# Altium PCB PCB1.PcbDoc
Units mm, origin at the board's own origin, x right, y up, seen from the top; angles counter-clockwise.
Board outline 69.47 x 25.4 mm, 2 copper layers (Top Layer, Bottom Layer); 44 components, 24 nets, 117 pads, 21 vias.
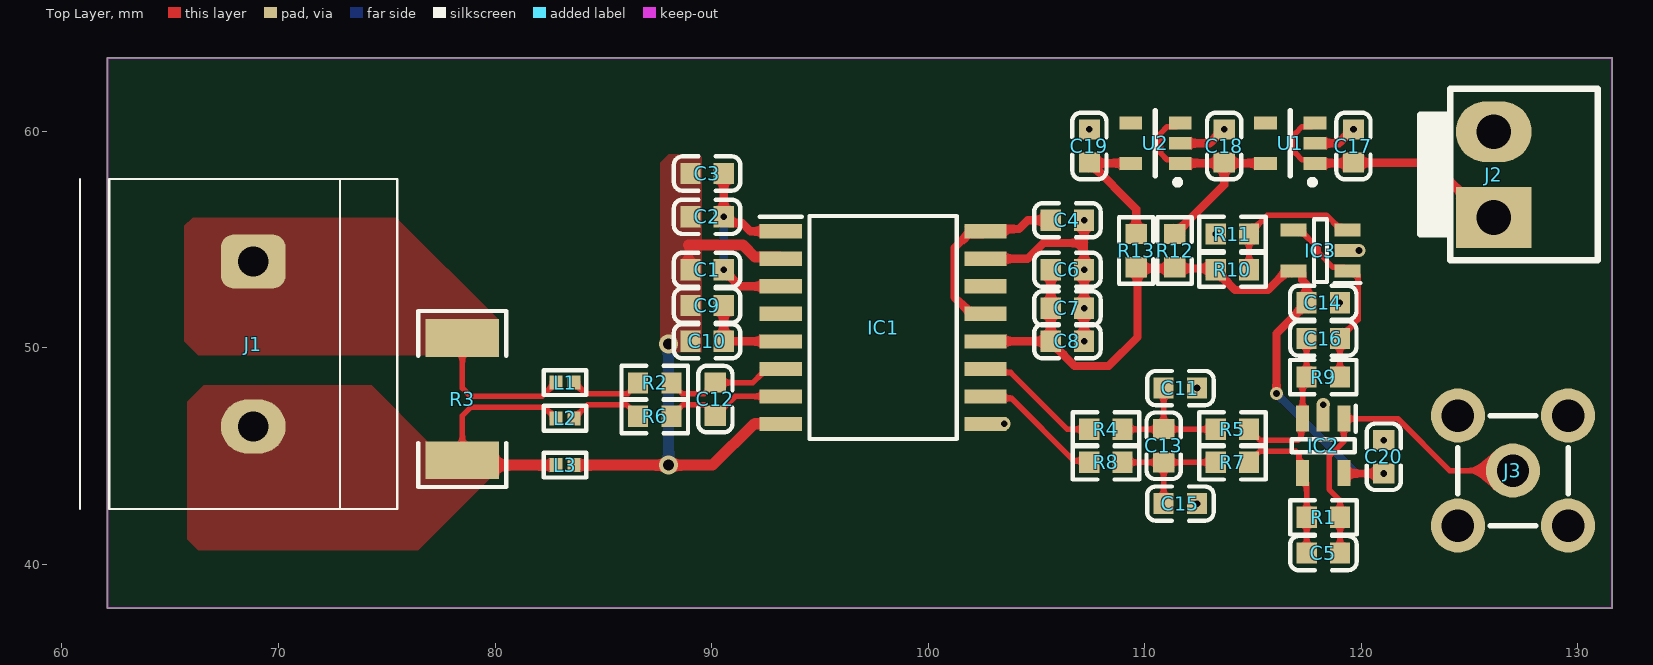
[diagram p0: Top Layer view]
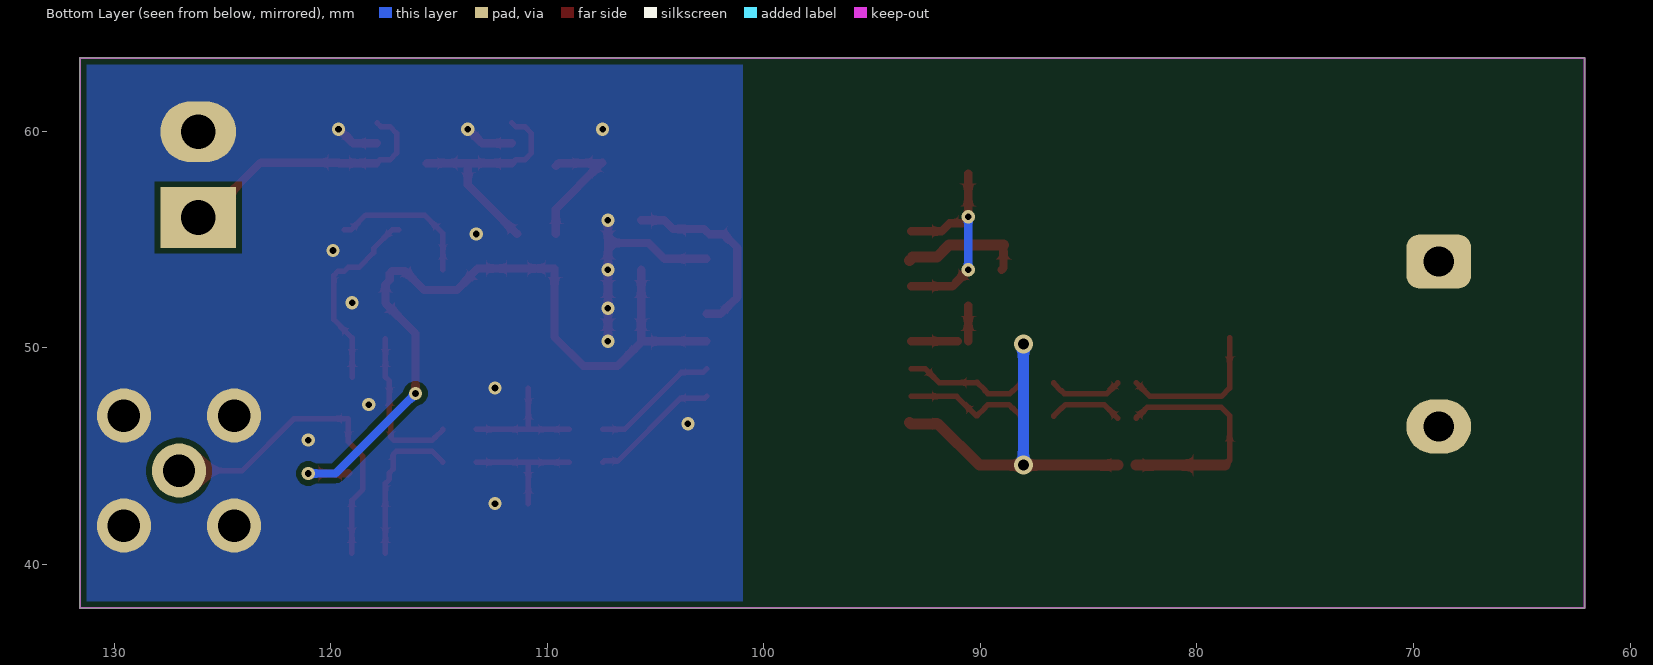
[diagram p1: Bottom Layer view, seen from below]
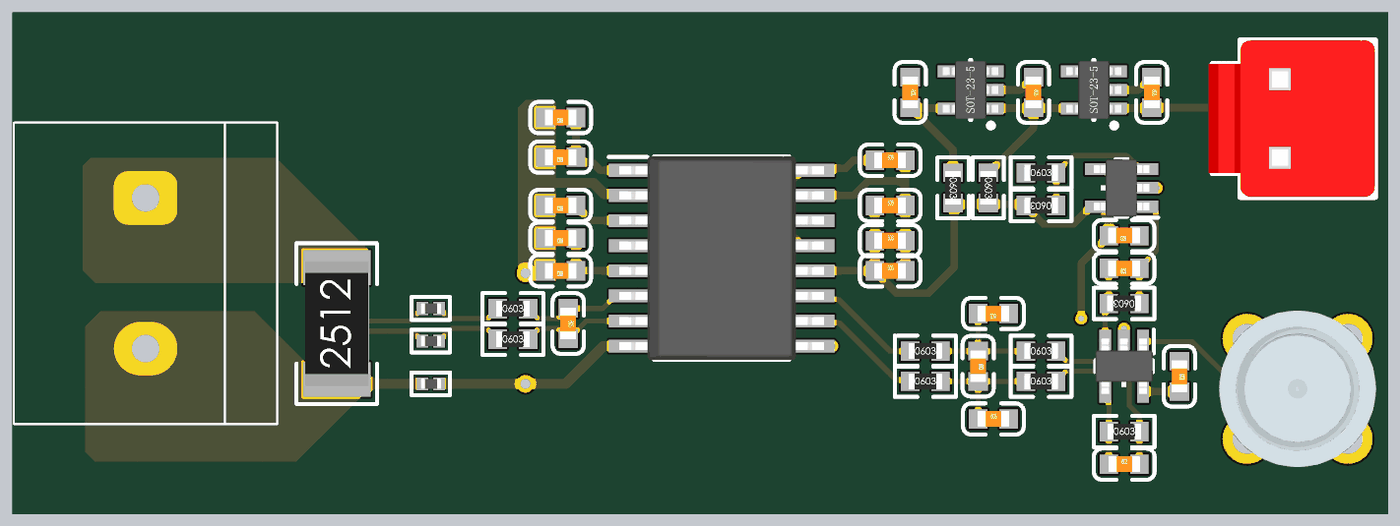
[diagram p2: 3D render of the assembled board from above, using the file's embedded part models]

## Layer stack, top to bottom
Top Solder: solder mask 0.0102, Solder Resist, Dk 3.5
Top Layer: signal copper 0.0356
Dielectric 1: dielectric 0.32, FR-4, Dk 4.8
Bottom Layer: signal copper 0.0356
Bottom Solder: solder mask 0.0102, Solder Resist, Dk 3.5

## Board outline
62.103,37.973 131.572,37.973 131.572,63.373 62.103,63.373

## Design rules (kind name [scope] priority, off if disabled: settings)
Clearance Clearance_1 [All] p1: gap=0.254 ignorepadtopadclearanceinfootprint=FALSE except(0.178: SMDPad-SMDPad)
Clearance [All] p2: gap=0.254 ignorepadtopadclearanceinfootprint=FALSE
HoleToHoleClearance [All] p1: gap=0 allowstackedmicrovias=TRUE
MinimumSolderMaskSliver [All] p1: minsoldermaskwidth=0
PlaneConnect [All] p1: planeconnectstyle=Direct reliefexpansion=0.508 reliefentries=4 reliefconductorwidth=0.254 reliefairgap=0.254
PolygonConnect [All] p1: connectstyle=Direct reliefconductorwidth=0.254 reliefentries=4 polygonreliefangle="90 Angle" airgapwidth=0.254
RoutingVias [All] p1: holewidth=0.254 width=0.559 viastyle="Through Hole" minholewidth=0.254 minwidth=0.508 maxholewidth=0.711 maxwidth=1.27
SilkToSilkClearance [All] p1: silktosilkclearance=0
SilkToSolderMaskClearance [IsPad] p1: minsilkscreentomaskgap=0 clearancetoexposedcopper=TRUE
SolderMaskExpansion [All] p1: expansion=0.102 istentingtop=FALSE
SupplyNets "Schematic Supply Nets_5" [InNet('GND')] p1: voltage=0.000
SupplyNets "Schematic Supply Nets_4" [InNet('Vin')] p2: voltage=0.000
SupplyNets "Schematic Supply Nets_3" [InNet('VCC')] p3: voltage=0.000
SupplyNets "Schematic Supply Nets_2" [InNet('+5V')] p4: voltage=0.000
SupplyNets "Schematic Supply Nets_1" [InNet('+3V3')] p5: voltage=0.000
SupplyNets "Schematic Supply Nets" [InNet('HGND')] p6: voltage=0.000
Width [All] p1: maxlimit=0.762 minlimit=0.254 preferedwidth=0.254
25 further rules are at their usual default settings.

## Components (designator, comment, footprint, x,y, rotation, side; value= is the part's Value field where it differs from the comment)
C1 "1nF" C-0603 89.789,53.594 r180 top
C2 "0.1uF" C-0603 89.789,56.039 r180 top
C3 "1uF" C-0603 89.789,58.039 r180 top
C4 "0.1uF" C-0603 106.426,55.88 r0 top
C5 "330pF" C-0603 118.245,40.513 r0 top
C6 "1nF" C-0603 106.426,53.594 r0 top
C7 "1uF" C-0603 106.426,51.816 r0 top
C8 "10uF" C-0603 106.426,50.292 r0 top
C9 "0.1uF" C-0603 89.789,51.943 r180 top
C10 "1nF" C-0603 89.789,50.292 r180 top
C11 "NP" C-0603 111.641,48.133 r180 top
C12 "10nF" C-0603 90.17,47.625 r270 top
C13 "NP" C-0603 110.871,45.466 r270 top
C14 "0.1uF" C-0603 118.237,52.07 r180 top
C15 "NP" C-0603 111.641,42.799 r0 top
C16 "330pF" C-0603 118.237,50.419 r180 top
C17 "1uF" C-0603 119.634,59.309 r270 top
C18 "1uF" C-0603 113.665,59.309 r270 top
C19 "1uF" C-0603 107.442,59.309 r270 top
C20 "0.1uF" C-0603 121.031,44.958 r270 top
IC1 "AMC3302DWE" SOIC127P1030X265-16N 97.917,50.927 r0 top
IC2 "TLV9001IDBVR" SOT95P280X145-5N 118.237,45.466 r270 top
IC3 "TLV9001IDBVR" SOT95P280X145-5N 118.11,54.483 r180 top
J1 "J-2PIN" "CON  7.62mm 2x1P" 68.834,50.165 r270 top
J2 "J-2PIN" J-VH3.96-2A 126.111,56.007 r90 top
J3 "J-2PIN" "SMA RF同轴链接器" 127,44.323 r0 top
L1 "FB" L-0402 83.229,48.387 r0 top
L2 "FB" L-0402 83.229,46.736 r0 top
L3 "FB" L-0402 83.229,44.577 r0 top
R1 "3.3k" R-0603 118.245,42.164 r0 top
R2 "10R" R-0603 87.376,48.37 r0 top
R3 "R" R-2512 78.486,47.625 r90 top
R4 "0R" R-0603 108.204,46.228 r0 top
R5 "3.3k" R-0603 114.046,46.228 r0 top
R6 "10R" R-0603 87.376,46.83 r0 top
R7 "3.3k" R-0603 114.046,44.704 r0 top
R8 "0R" R-0603 108.204,44.704 r0 top
R9 "3.3k" R-0603 118.237,48.641 r180 top
R10 "3.3k" R-0603 114.046,53.594 r180 top
R11 "3.3k" R-0603 114.046,55.245 r0 top
R12 "0R" R-0603 111.379,54.483 r270 top
R13 "0R" R-0603 109.601,54.483 r270 top
U1 "TPS7A20-5V" SOT-235 116.713,59.436 r180 top
U2 "TPS7A20-3V3" SOT-235 110.49,59.436 r180 top

## Footprints (in the part's own frame and the unit in brackets; to place one, negate y for a bottom-side part, rotate by r counter-clockwise, add the part's x,y. Pads: shape width x height; smd on the part's side, far side on the other; paste and mask are expansions set on the pad)
C-0603 [mm]
  rect 0.93x0.98 smd: 1(-0.77,0) 2(0.77,0)
  silkscreen extent -1.53,-0.79 1.54,0.79, body extent -0.8,-0.4 0.8,0.4, height 0.3
"CON  7.62mm 2x1P" [mm]
  rrect50% 2.5x3 hole 1.4: 1(-3.81,0)
  oval 2.5x3 hole 1.4: 2(3.81,0)
  silkscreen extent -7.62,-8 7.62,6.65
J-VH3.96-2A [mm]
  rect 2.8x3.5 hole 1.6: 1(0,0)
  oval 2.8x3.5 hole 1.6: 2(3.96,0)
  silkscreen extent -1.98,-4.8 5.94,3.4, body extent -1.98,-4.8 5.94,3.6, height 14.6
L-0402 [mm]
  rect 0.6x0.65 smd mask+0.051: 1(-0.425,0) 2(0.425,0)
  silkscreen extent -0.97,-0.58 0.97,0.58, body extent -0.51,-0.26 0.54,0.26, height 0.36
R-0603 [mm]
  rect 0.93x0.98 smd: 1(-0.77,0) 2(0.77,0)
  silkscreen extent -1.53,-0.79 1.54,0.79, body extent -0.85,-0.4 0.85,0.4, height 0.56
R-2512 [mm]
  rect 1.75x3.4 smd: 1(-2.825,0) 2(2.825,0)
  silkscreen extent -4.06,-2.03 4.06,2.03, body extent -3.16,-1.6 3.16,1.6, height 0.62
"SMA RF同轴链接器" [mm]
  round 2.5 hole 1.5: 1(0,0) 2(-2.54,-2.54) 2(-2.54,2.54) 2(2.54,-2.54) 2(2.54,2.54)
  silkscreen extent -2.54,-2.54 2.54,2.54, body extent -3.96,-3.96 3.96,3.96, height 9.5
SOIC127P1030X265-16N [mm]
  rect 1.95x0.65 smd: 1(-4.725,4.445) 2(-4.725,3.175) 3(-4.725,1.905) 4(-4.725,0.635) 5(-4.725,-0.635) 6(-4.725,-1.905) 7(-4.725,-3.175) 8(-4.725,-4.445) 9(4.725,-4.445) 10(4.725,-3.175) 11(4.725,-1.905) 12(4.725,-0.635) 13(4.725,0.635) 14(4.725,1.905) 15(4.725,3.175) 16(4.725,4.445)
  silkscreen extent -5.7,-5.15 3.4,5.15, body extent -5.17,-5.15 5.17,5.15, height 2.59
SOT95P280X145-5N [mm]
  rect 1.2x0.6 smd: 1(-1.25,0.95) 2(-1.25,0) 3(-1.25,-0.95) 4(1.25,-0.95) 5(1.25,0.95)
  silkscreen extent -1.85,-1.45 0.3,1.5, body extent -1.4,-1.45 1.4,1.45, height 1.2
SOT-235 [mm] "SOT23, 5-Leads, Body 3.0x2.6mm (max), Pitch 0.95mm, IPC Medium Density"
  rect 1.05x0.6 smd: 1(-1.143,0.94) 2(-1.143,0) 3(-1.143,-0.94) 4(1.143,-0.94) 5(1.143,0.94)
  silkscreen extent -1.15,-1.5 0,1.92, body extent -1.4,-1.45 1.4,1.45, height 1.2

## Part data
C1 C2 C3 C4 C5 C6 C7 C8 C9 C10 C11 C12 C13 C14 C15 C16 C17 C18 C19 C20: library part C, "Non Polarised"
IC1: "Integrated Circuit", Manufacturer_Name="Texas Instruments", Mouser Part Number=595-AMC3302DWE, Arrow Part Number=AMC3302DWE, Arrow Price/Stock=https://www.arrow.com/en/products/amc3302dwe/texas-instruments?region=nac, Datasheet Link=https://www.ti.com/lit/ds/symlink/amc3302.pdf?ts=1643366130509, Height=2.65mm, Manufacturer_Part_Number=AMC3302DWE, Mouser Price/Stock=https://www.mouser.co.uk/ProductDetail/Texas-Instruments/AMC3302DWE?qs=DRkmTr78QAT3OfY8Rd%252BeWA%3D%3D
IC2 IC3: "Integrated Circuit", Manufacturer_Name="Texas Instruments", Mouser Part Number=595-TLV9001IDBVR, Arrow Part Number=TLV9001IDBVR, Arrow Price/Stock=https://www.arrow.com/en/products/tlv9001idbvr/texas-instruments?region=europe, Datasheet Link=http://www.ti.com/lit/gpn/tlv9001, Height=1.45mm, Manufacturer_Part_Number=TLV9001IDBVR, Mouser Price/Stock=https://www.mouser.co.uk/ProductDetail/Texas-Instruments/TLV9001IDBVR?qs=gTYE2QTfZfR6dUkET6Yj7w%3D%3D
L1 L2 L3: library part L-SMD, "1.8k@100Mhz"
R1 R2 R4 R5 R6 R7 R8 R9 R10 R11 R12 R13: library part R, "Resistor"
R3: "Resistor"
U1: library part TPS7A20-3V3, "LDO  最大输出300mA"
U2: "LDO  最大输出300mA"

## Via types
v1: diameter 0.61, hole 0.305, Top Layer to Bottom Layer, 19 vias
v2: diameter 0.889, hole 0.508, Top Layer to Bottom Layer, 2 vias

## Nets (pads, with @x,y where several pads share a name; then routed paths per layer and width w, separated by ;. In a path a pad name is that pad's centre, name@x,y a point inside that pad or via, vN(x,y) a via of type N, cw(c..) or ccw(c..) an arc to the next point about the centre after c; other vN are vias at no path point)
+3V3: C19.2 R13.1 U2.5 | length 6.4
  Top Layer w0.381: C19.2 107.467,58.539 C19.2@107.488,58.518 ; R13.1 109.601,56.405 C19.2@107.488,58.518 ; U2.5@109.601,58.387 109.47,58.518 C19.2@107.488,58.518
+5V: C18.2 R12.1 U1.5 U2.1 U2.3 | length 11.3
  Top Layer w0.254: U2.1 111.46,58.669 111.036,58.669 110.727,58.978 110.727,59.894 111.036,60.203 111.46,60.203 U2.3
  Top Layer w0.381: R12.1 111.404,55.253 113.665,57.514 C18.2@113.665,58.518 ; U2.1 111.654,58.518 C18.2@113.665,58.518 ; U1.5 115.549,58.518 C18.2@113.665,58.518
GND: C4.2 C6.2 C7.2 C8.2 C11.1 C14.1 C15.2 C17.1 C18.1 C19.1 C20.1 IC1.9 IC1.15 IC2.2 IC3.2 J2.2 J3.2 R11.1 U1.2 U2.2 | length 14.8
  Top Layer w0.381: IC1.15 104.58,54.102 105.312,54.833 107.196,54.833 ; v1(107.196,50.292) v1(107.196,51.816) v1(107.196,53.594) 107.196,54.833 ; v1(107.196,55.88) 107.196,54.833 ; U2.2 112.997,59.436 113.64,60.079 v1(113.665,60.079) ; U1.2 118.966,59.436 119.609,60.079 v1(119.634,60.079)
  other v1: 112.411,42.799 121.031,45.728 103.505,46.482 118.237,47.371 112.411,48.133 119.007,52.07 119.888,54.483 113.276,55.245 107.442,60.079
HGND: C1.2 C2.2 C3.2 C9.2 C10.2 IC1.2 IC1.8 L3.2 | length 21.8
  Top Layer w0.381: 88.931,54.737 88.931,53.682 C1.2
  Top Layer w0.508: L3.2 v2(88.011,44.577) 90.043,44.577 91.948,46.482 IC1.8 IC1.8@93.263,46.553 ; 88.931,54.737 91.44,54.737 92.004,54.173 93.121,54.173 IC1.2@93.263,54.031
  Bottom Layer w0.508: v2(88.011,44.577) v2(88.011,50.165)
NetC1_1: C1.1 C2.1 C3.1 IC1.1 IC1.3 | length 10.3
  Top Layer w0.381: v1(90.559,53.594) 90.559,53.569 91.296,52.832 IC1.3 ; C3.1 v1(90.559,56.039) 90.559,56.014 90.834,55.739 91.426,55.739 91.793,55.372 IC1.1
  Bottom Layer w0.381: v1(90.559,53.594) v1(90.559,56.039)
NetC4_1: C4.1 IC1.13 IC1.16 | length 9
  Top Layer w0.381: IC1.13 101.992,51.562 101.501,52.053 101.492,52.053 101.222,52.323 101.222,54.611 101.849,55.237 102.507,55.237 IC1.16 102.748,55.478 104.189,55.478 104.591,55.88 C4.1
NetC5_1: C5.1 IC2.4 R1.1 R7.2 | length 7.3
  Top Layer w0.254: R7.2 114.816,44.729 115.299,45.212 116.965,45.212 117.114,45.063 117.114,44.389 IC2.4 117.287,43.916 117.475,43.728 R1.1 C5.1
NetC9_1: C9.1 C10.1 IC1.5 | length 3.8
  Top Layer w0.381: C10.1 C9.1 ; 91.042,50.292 IC1.5
NetC11_2: C11.2 C13.1 R4.2 R5.1 | length 6.2
  Top Layer w0.254: R4.2 R5.1 ; C13.1 C11.2
NetC12_1: C12.1 IC1.6 R2.2 | length 5.8
  Top Layer w0.254: R2.2 88.146,48.345 88.484,48.007 88.509,48.007 88.637,47.879 89.654,47.879 89.807,48.032 89.807,48.057 90.145,48.395 C12.1 90.178,48.387 91.907,48.387 92.542,49.022 IC1.6
NetC12_2: C12.2 IC1.7 R6.2 | length 5.9
  Top Layer w0.254: R6.2 88.146,46.855 88.484,47.193 88.509,47.193 88.687,47.371 89.654,47.371 89.807,47.218 89.807,47.193 90.145,46.855 C12.2 ; C12.2@90.195,46.855 91.092,47.752 IC1.7
NetC13_2: C13.2 C15.1 R7.1 R8.2 | length 6.2
  Top Layer w0.254: R8.2 R7.1 ; C15.1 C13.2
NetC16_1: C16.1 IC3.1 IC3.4 R9.1 | length 9
  Top Layer w0.254: IC3.4 117.16,55.433 118.016,54.577 118.016,54.389 118.698,53.706 119.187,53.706 IC3.1 119.66,53.533 119.853,53.34 119.853,51.29 119.007,50.444 C16.1 R9.1
NetC16_2: C16.2 IC2.3 R5.2 R9.2 | length 7.3
  Top Layer w0.254: R5.2 114.816,46.203 115.154,45.865 115.179,45.865 115.324,45.72 117.072,45.72 117.221,45.869 117.221,46.65 IC2.3 117.287,48.461 R9.2 C16.2
NetIC1_10: IC1.10 R8.1 | length 6.1
  Top Layer w0.254: IC1.10 102.732,47.662 103.849,47.662 106.737,44.774 107.364,44.774 R8.1
NetIC1_11: IC1.11 R4.1 | length 5.9
  Top Layer w0.254: IC1.11 102.812,48.852 103.802,48.852 106.426,46.228 R4.1
NetIC3_3: IC3.3 R10.1 R11.2 | length 6.9
  Top Layer w0.254: R10.1 R11.2 114.816,55.27 115.66,56.114 118.379,56.114 119.06,55.433 IC3.3
NetJ1_1: J1.1 L1.1 R3.2 | length 7.1
  Top Layer w0.254: R3.2 78.486,48.133 78.867,47.752 82.169,47.752 L1.1
NetJ1_2: J1.2 L2.1 L3.1 R3.1 | length 11.2
  Top Layer w0.254: R3.1@78.709,44.577 R3.1 78.486,46.863 78.867,47.244 82.296,47.244 82.606,46.934 82.631,46.934 82.804,46.761 L2.1
  Top Layer w0.508: R3.1@78.709,44.577 L3.1
NetL1_2: L1.2 R2.1 | length 3.4
  Top Layer w0.254: L1.2 83.654,48.362 83.827,48.189 83.852,48.189 84.162,47.879 86.115,47.879 86.243,48.007 86.268,48.007 86.606,48.345 R2.1
NetL2_2: L2.2 R6.1 | length 3.5
  Top Layer w0.254: L2.2 84.289,47.371 86.065,47.371 86.243,47.193 86.268,47.193 86.606,46.855 R6.1
out: C5.2 IC2.1 J3.1 R1.2 | length 15.5
  Top Layer w0.254: C5.2 119.015,42.949 118.506,43.458 118.506,44.974 119.187,45.655 IC2.1 121.68,46.716 124.073,44.323 J3.1
VCC: C6.1 C7.1 C8.1 C14.2 C20.2 IC1.12 IC2.5 IC3.5 R10.2 R12.2 R13.2 | length 37.5
  Top Layer w0.381: IC1.12 C8.1 ; C6.1 C7.1 C8.1 ; v1(116.078,47.879) 116.078,50.656 117.467,52.045 C14.2 117.467,52.926 117.27,53.123 117.27,53.423 117.16,53.533 IC3.5 116.56,53.533 115.686,52.659 114.167,52.659 113.55,53.276 113.55,53.319 R10.2 113.216,53.653 109.66,53.653 109.66,50.478 108.331,49.149 106.755,49.149 106.277,49.627 106.277,49.646 105.656,50.267 C8.1 ; IC2.5 119.215,44.188 v1(121.031,44.188)
  Bottom Layer w0.381: v1(116.078,47.879) 119.769,44.188 v1(121.031,44.188)
Vin: C17.2 J2.1 U1.1 U1.3 | length 12.4
  Top Layer w0.254: U1.3 117.683,60.203 117.259,60.203 116.95,59.894 116.95,58.978 117.259,58.669 117.726,58.669 U1.1@117.877,58.518
  Top Layer w0.381: U1.1@117.877,58.518 119.613,58.518 C17.2 123.229,58.539 125.761,56.007 J2.1
pads on no net: IC1.4 IC1.14 U1.4 U2.4

## Polygon pours and split planes (outlines as drawn)
HGND on Top Layer "HGND_L01_P004" (solid, pour order 4): 87.63,58.547 87.63,50.038 87.884,49.784 89.535,49.784 89.535,58.801 89.408,58.928 88.011,58.928
NetJ1_2 on Top Layer "NETJ1_2_L01_P002" (solid, pour order 2): 79.756,43.942 78.105,45.593 76.962,45.593 74.295,48.26 66.548,48.26 65.786,47.498 65.786,41.148 66.294,40.64 76.454,40.64
NetJ1_1 on Top Layer "NETJ1_1_L01_P000" (solid, pour order 0): 75.438,56.007 66.04,56.007 65.659,55.626 65.659,50.292 66.294,49.657 76.962,49.657 76.962,50.165 78.994,50.165 80.137,51.308
GND on Bottom Layer "GND_L02_P001" (solid, pour order 1): 100.965,37.592 100.965,63.627 131.191,63.627 131.953,62.865 131.572,62.484 131.572,37.592

## Keep-outs
Keep-Out Layer:
  the board outline again, w0.1